# EAGLE board MCAT-CANYVAL-TOP-5X (EAGLE 7.2.0), part 1 of 2
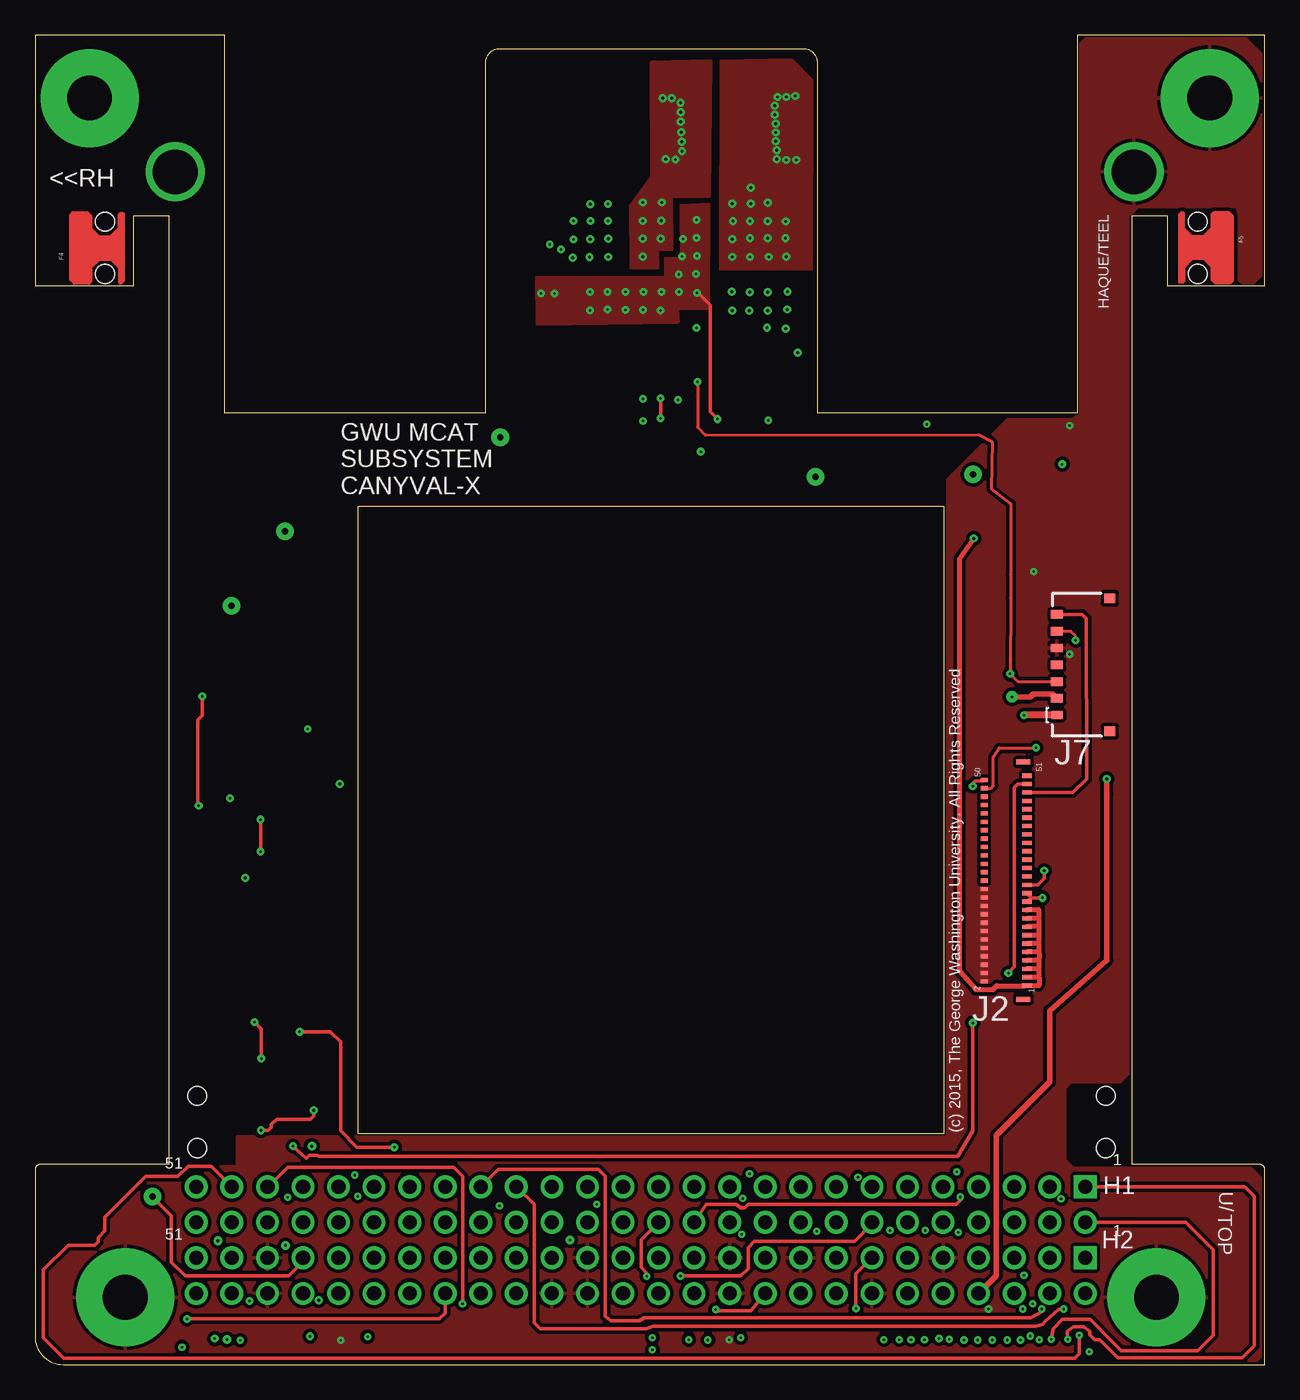
[diagram p0: board, top side]
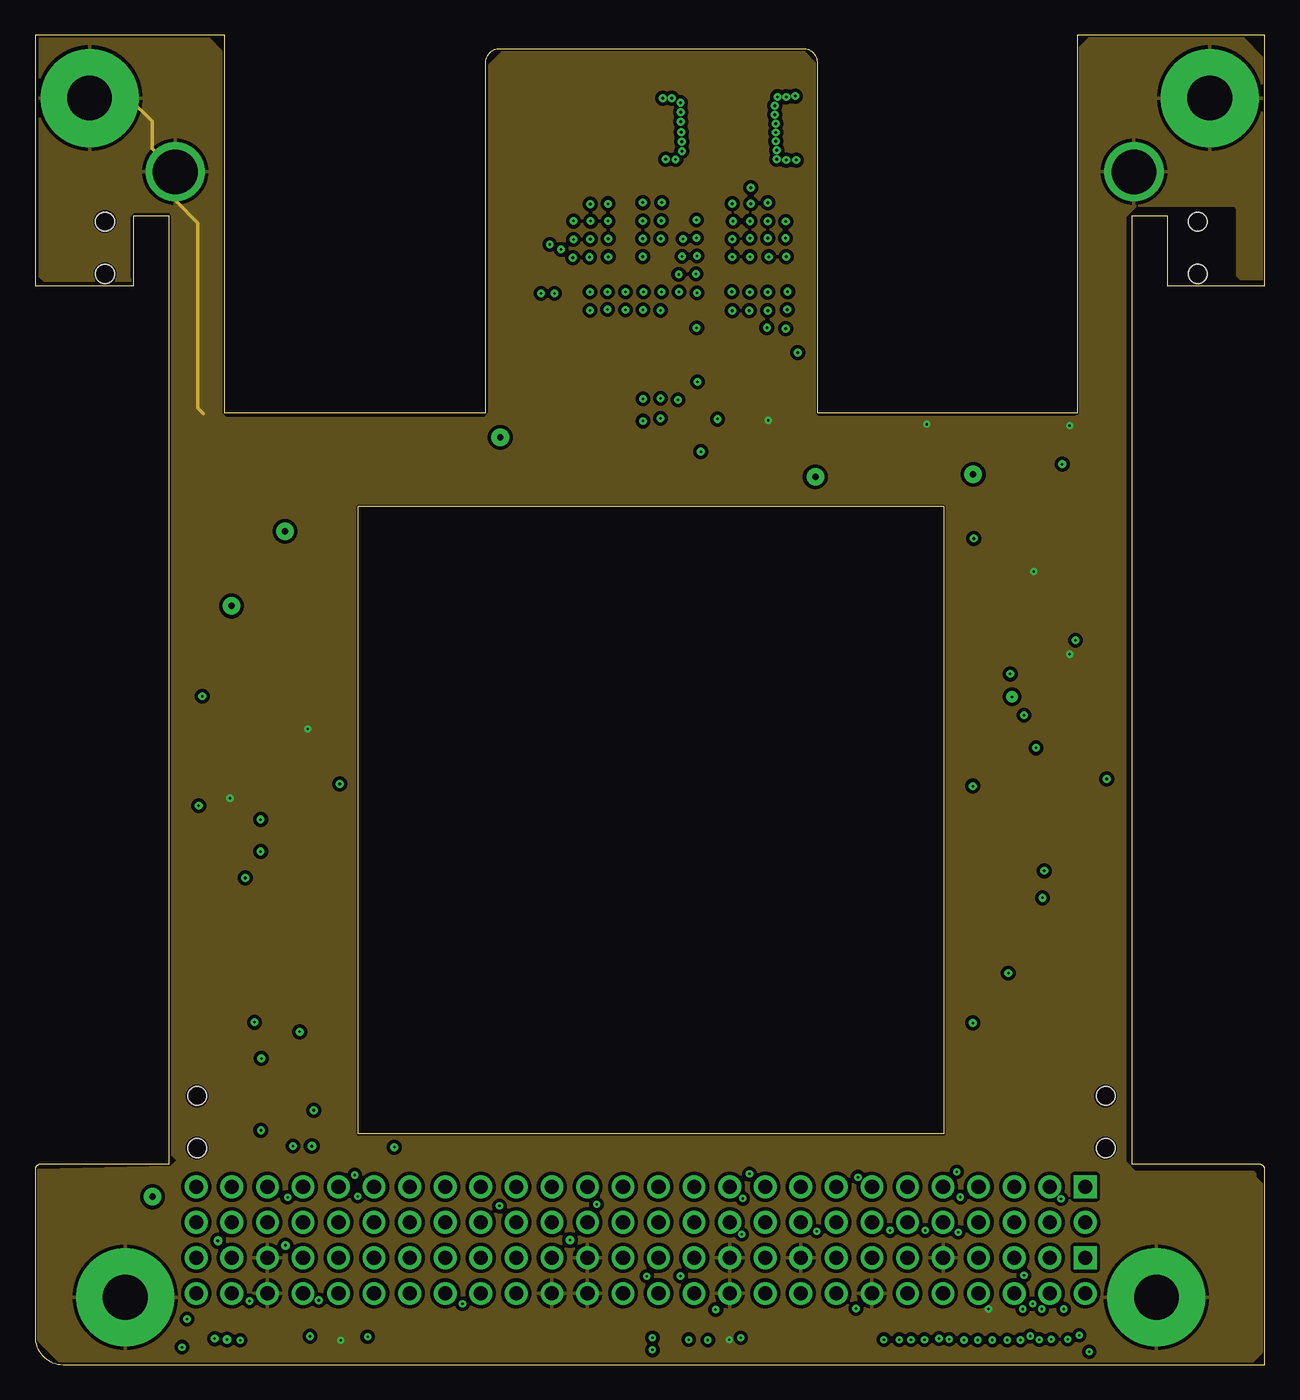
[diagram p1: board, inner layer L2/TopGround]
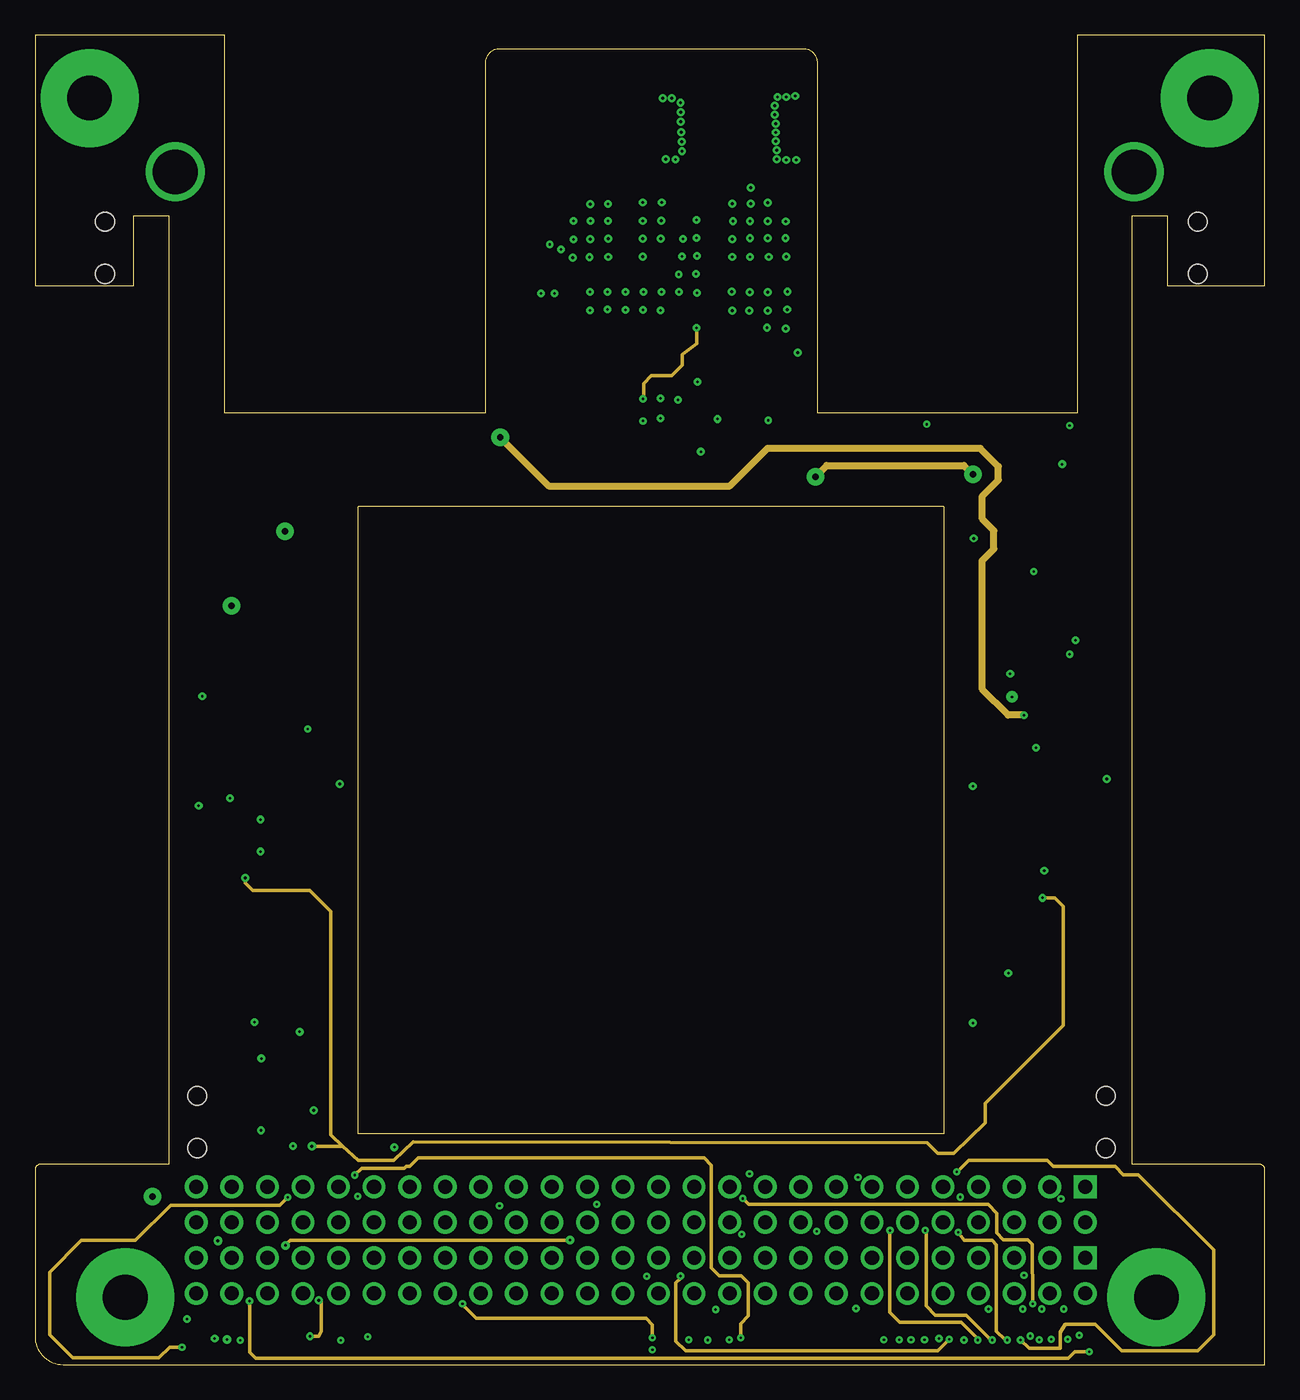
[diagram p2: board, inner layer L3/Power1]
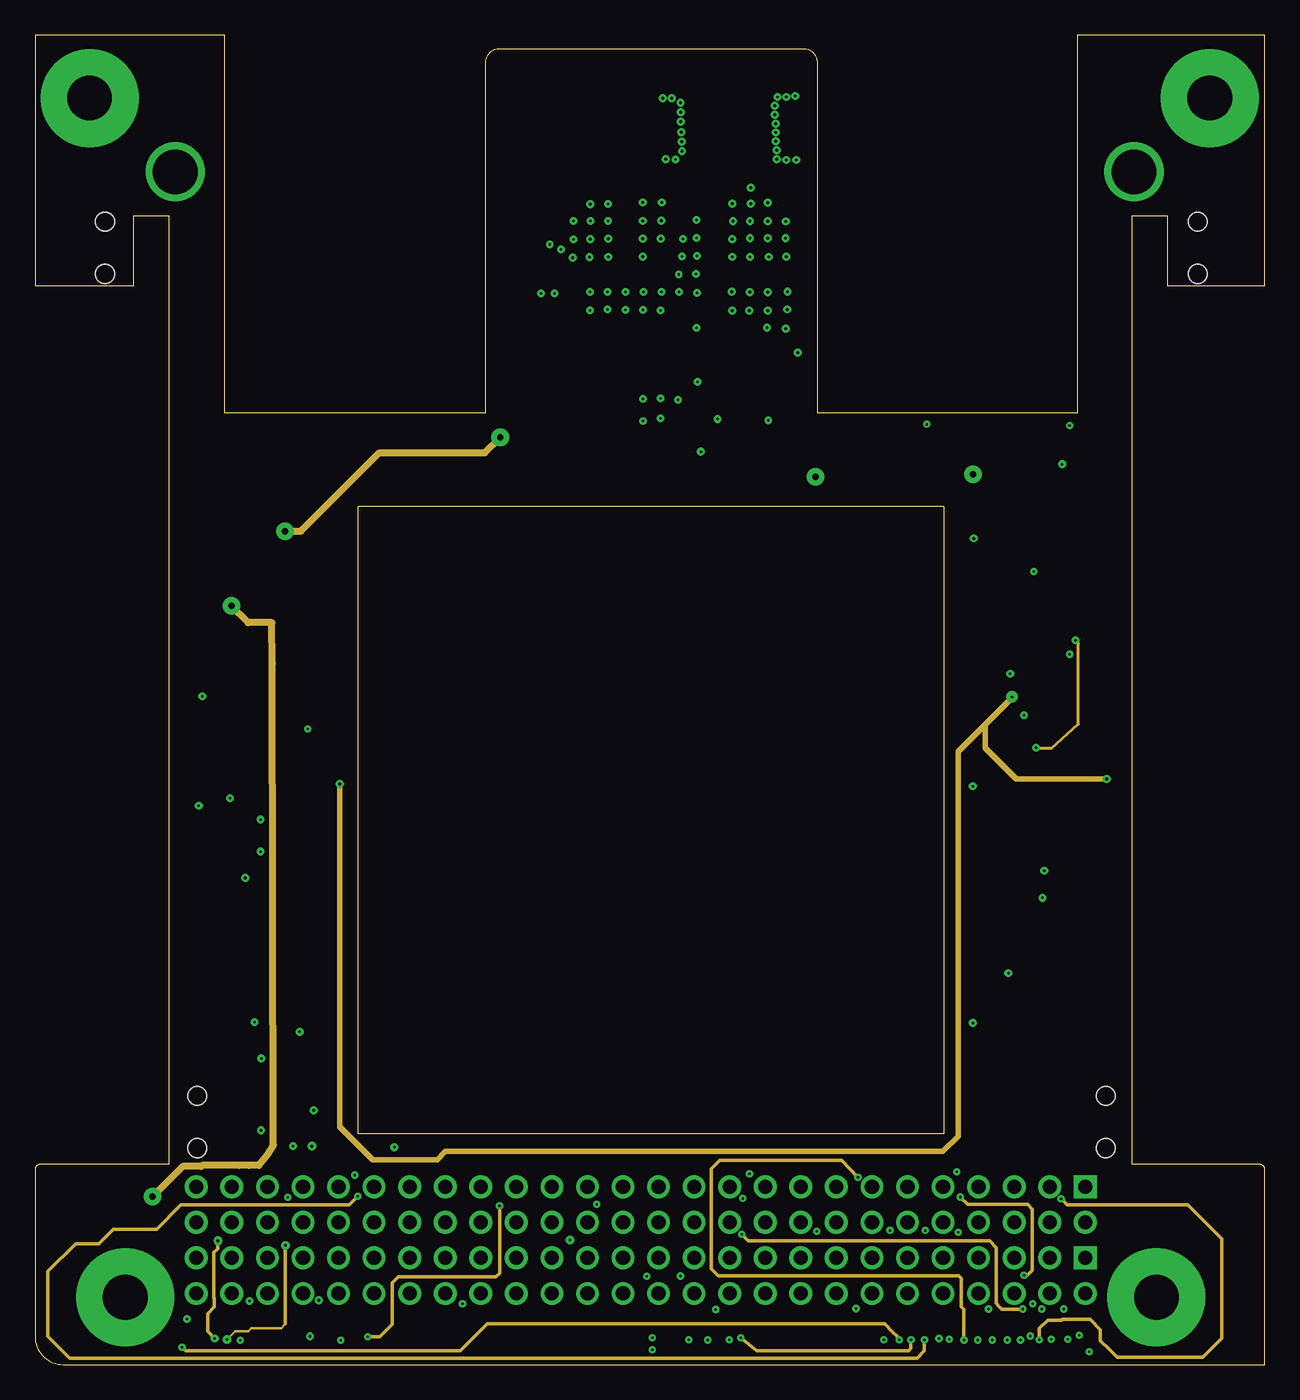
[diagram p3: board, inner layer L14/Power2]
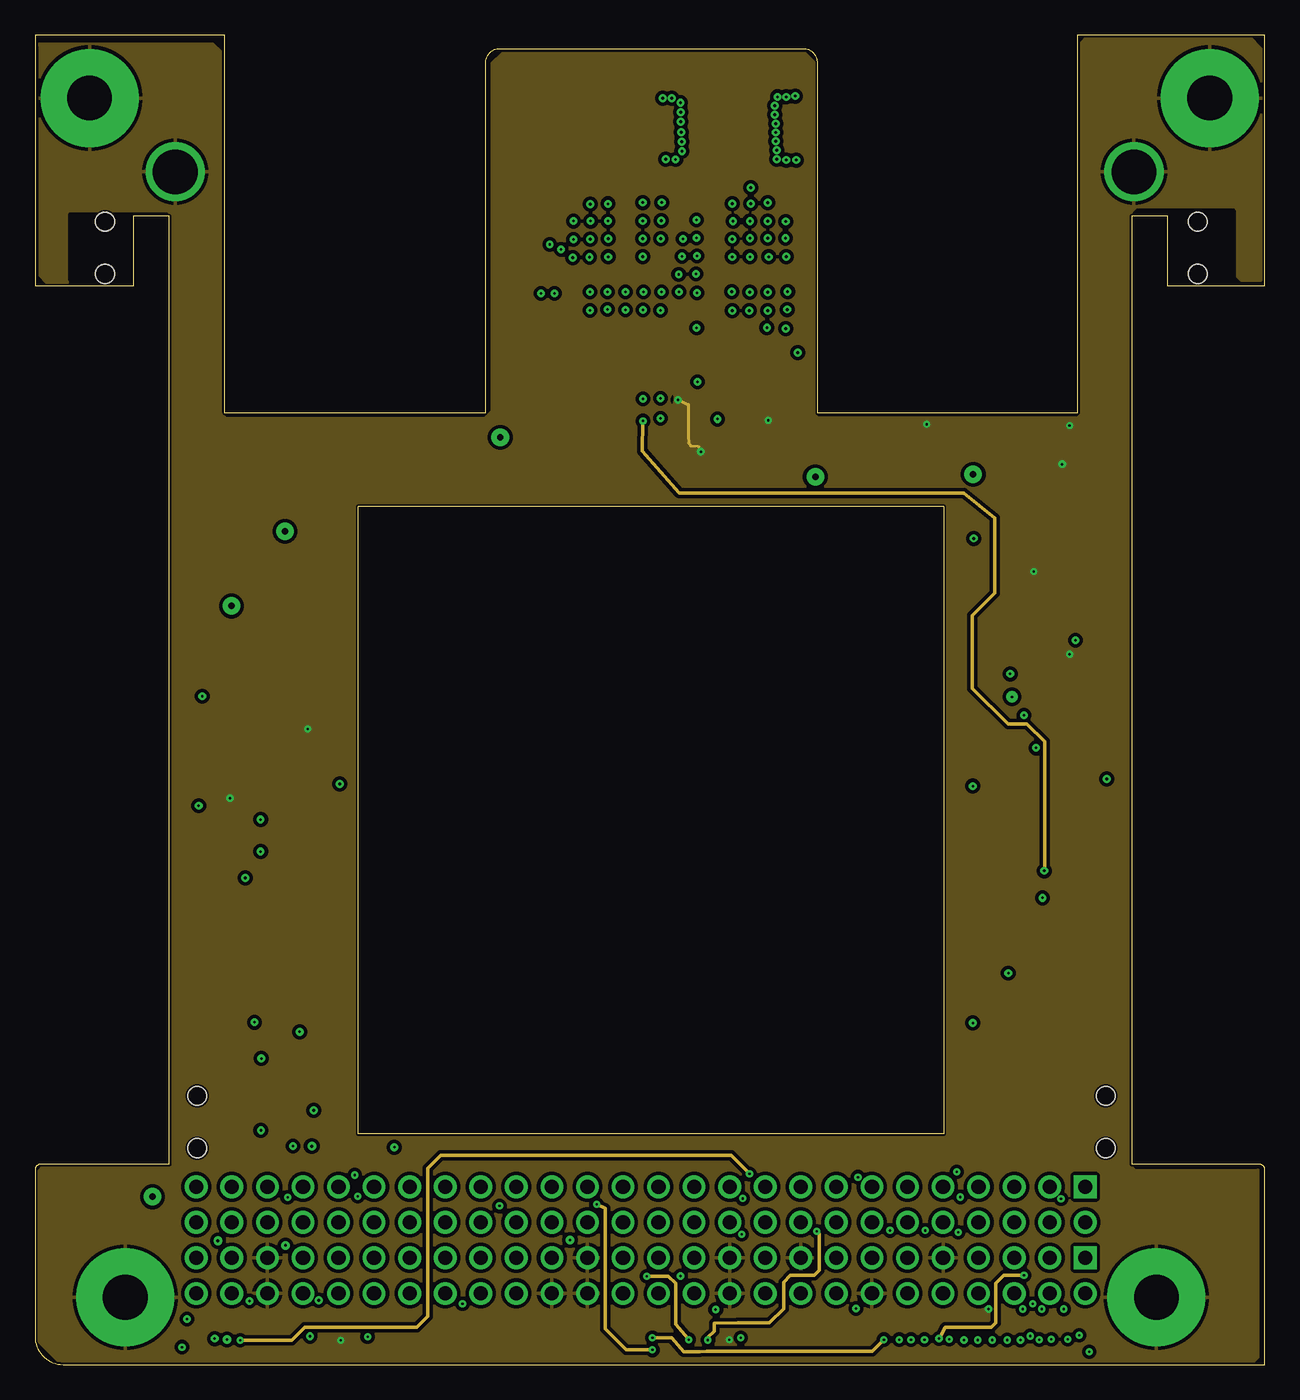
[diagram p4: board, inner layer L15/BottomGround]
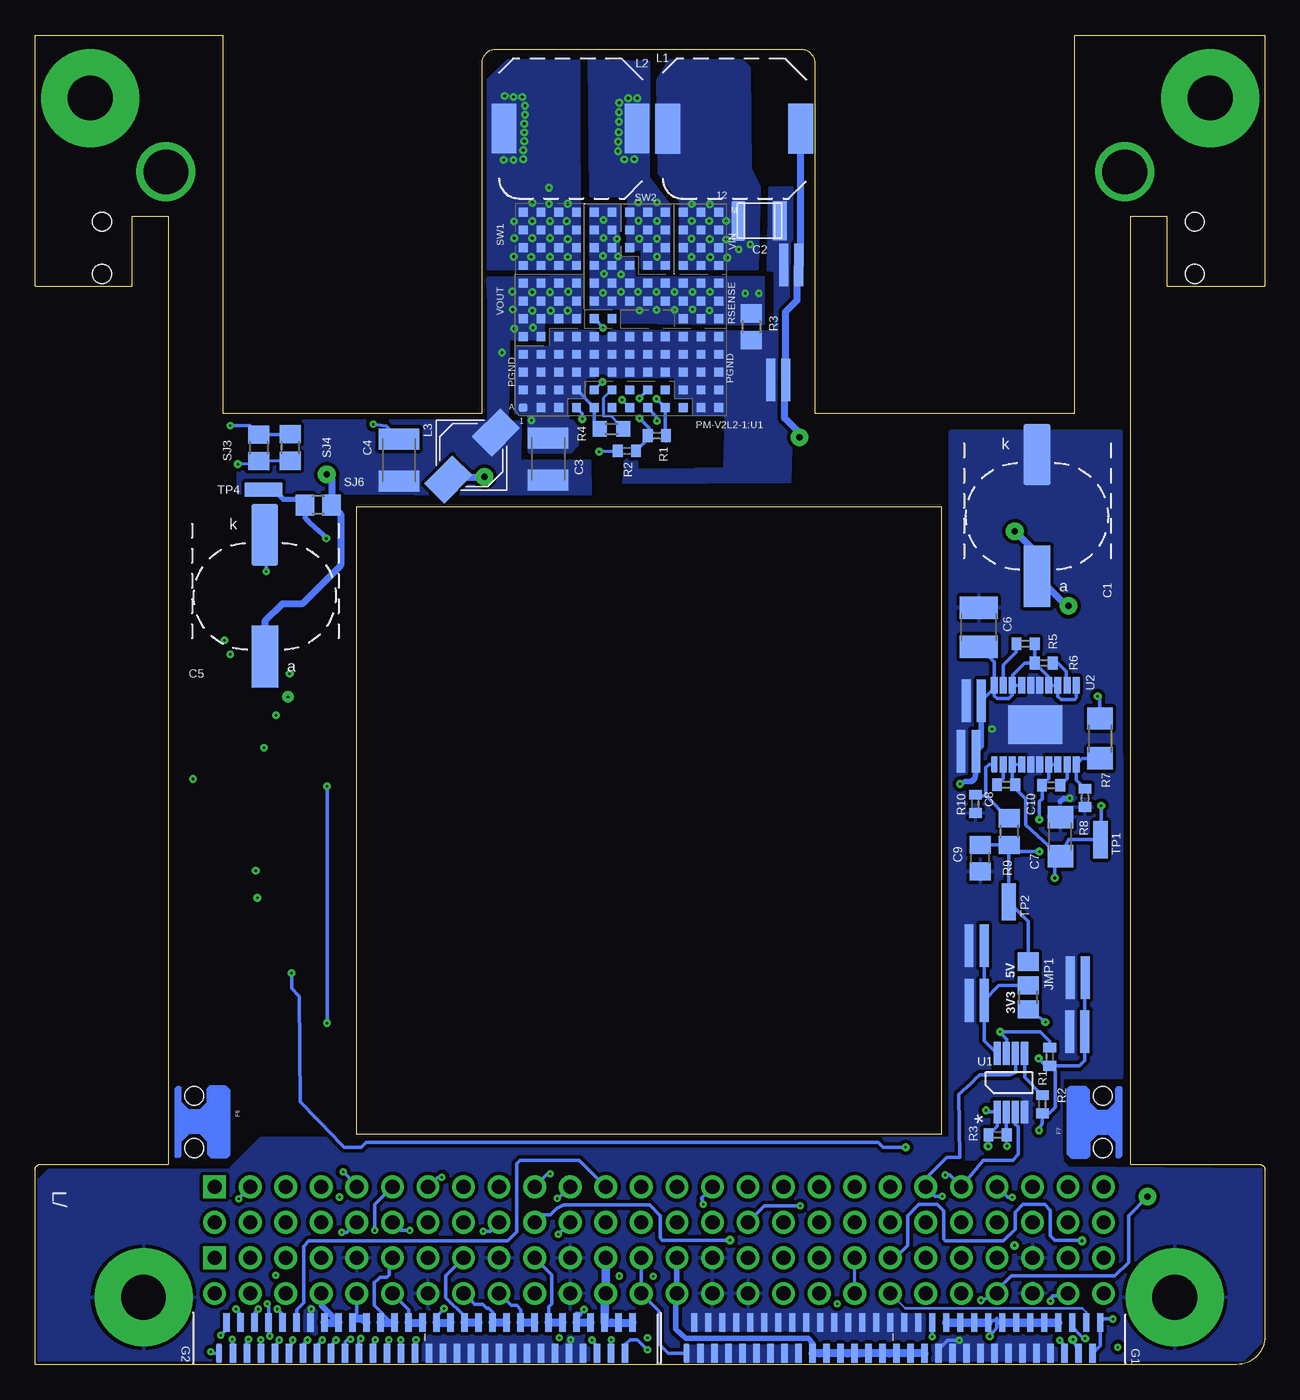
[diagram p5: board, bottom side, seen from below]

Size 87.85 x 95 mm. Coordinates in mm from the lower left corner, seen from the top.
Copper layers (1+2*3+14*15+16): L1/TopSignal 0.035559375mm / dielectric 3.5mil / L2/TopGround 0.01778125mm / dielectric 47mil / L3/Power1 0.0356mm / dielectric 12mil / L14/Power2 0.0356mm / dielectric 0.1499mm / L15/BottomGround 0.01778125mm / dielectric 3.5mil / L16/BottomSignal 0.035559375mm
Design rules "mcat-4cu-c-X3 *": minimum track width 6mil, minimum drill 6mil, track to track 10mil, track to pad 5mil, pad to pad 5mil, via to via 6mil, smd to smd 1mil, copper to edge 5mil, drill to drill 5mil, minimum pad ring 12mil, minimum via ring 7mil, stop-mask expansion 0mil, vias tented up to drill 8mil, thermal gap 10mil
Net classes: 0 default: width 0.051 mm; 1 1A-2OZ: width 0.152 mm; 2 2A-2OZ: width 0.356 mm; 3 0.3A-2OZ: width 0.254 mm; 4 General-1mil-100mA: width 0.025 mm; 5 0.5-2OZ: width 0.051 mm; 6 3A-2OZ: width 1.194 mm; 7 4.5A-2OZ: width 1.524 mm

## Footprints (pad centres in the part's own frame; a part is rotated, then mirrored left to right if it is on the bottom)
MCAT-4CU-C-TOP-V4-BLANK = drill 3.2: GND -78.97,85.22; GND@6 -10.49,85.22 | drill 3.2 pad 7: GND@1 -5.08,90.5; GND@2 -8.89,4.8; GND@3 -85.09,90.5; GND@4 -82.55,4.8
0612-REV = smd 3.05 x 0.635: 1 0,0; 2 0,1.077
MOLEX-78171-5007 = smd 0.6 x 0.85: 1 -3.6,0; 2 -2.4,0; 3 -1.2,0; 4 0,0; 5 1.2,0; 6 2.4,0; 7 3.6,0 | smd 0.7 x 0.8: 99 -4.75,-3.775; 100 4.75,-3.775
A0R-JMP = smd 1.5 x 1.3: 1 0,1.7; 2 0,0; 3 0,-1.7
R0402 = smd 0.7 x 0.9: 1 -0.65,0; 2 0.65,0
SOT505-1 = smd 1.626 x 0.508: 1 -2.095,0.975; 2 -2.095,0.325; 3 -2.095,-0.325; 4 -2.095,-0.975; 5 2.095,-0.975; 6 2.095,-0.325; 7 2.095,0.325; 8 2.095,0.975
SMTRA-M2-6-5 = hole 1.35: -1.869,0; 1.869,0
HIROSE-FH40-60S-0.5SV = smd 0.455 x 1.35: 1 0,0; 2 -1,0; 3 -2,0; 4 -3,0; 5 -4,0; 6 -5,0; 7 -6,0; 8 -7,0; 9 -8,0; 10 -9,0; 11 -10,0; 12 -11,0; 13 -12,0; 14 -13,0; 15 -14,0; 16 -15,0; 17 -16,0; 18 -17,0; 19 -18,0; 20 -19,0; 21 -20,0; 22 -21,0; 23 -22,0; 24 -23,0; 25 -24,0; 26 -25,0; 27 -26,0; 28 -27,0; 29 -28,0; 30 -29,0; 31 -0.554,-2.198; 32 -1.554,-2.198; 33 -2.554,-2.198; 34 -3.554,-2.198; 35 -4.554,-2.198; 36 -5.554,-2.198; 37 -6.554,-2.198; 38 -7.554,-2.198; 39 -8.554,-2.198; 40 -9.554,-2.198; 41 -10.554,-2.198; 42 -11.554,-2.198; 43 -12.554,-2.198; 44 -13.554,-2.198; 45 -14.554,-2.198; 46 -15.554,-2.198; 47 -16.554,-2.198; 48 -17.554,-2.198; 49 -18.554,-2.198; 50 -19.554,-2.198; 51 -20.554,-2.198; 52 -21.554,-2.198; 53 -22.554,-2.198; 54 -23.554,-2.198; 55 -24.554,-2.198; 56 -25.554,-2.198; 57 -26.554,-2.198; 58 -27.554,-2.198; 59 -28.554,-2.198; 60 -29.554,-2.198
CONN-2X26X0.1-HDR = drill 1.016 pad 1.524 square: 1 0,0 | drill 1.016 pad 1.524: 2 0,2.54; 3 2.54,0; 4 2.54,2.54; 5 5.08,0; 6 5.08,2.54; 7 7.62,0; 8 7.62,2.54; 9 10.16,0; 10 10.16,2.54; 11 12.7,0; 12 12.7,2.54; 13 15.24,0; 14 15.24,2.54; 15 17.78,0; 16 17.78,2.54; 17 20.32,0; 18 20.32,2.54; 19 22.86,0; 20 22.86,2.54; 21 25.4,0; 22 25.4,2.54; 23 27.94,0; 24 27.94,2.54; 25 30.48,0; 26 30.48,2.54; 27 33.02,0; 28 33.02,2.54; 29 35.56,0; 30 35.56,2.54; 31 38.1,0; 32 38.1,2.54; 33 40.64,0; 34 40.64,2.54; 35 43.18,0; 36 43.18,2.54; 37 45.72,0; 38 45.72,2.54; 39 48.26,0; 40 48.26,2.54; 41 50.8,0; 42 50.8,2.54; 43 53.34,0; 44 53.34,2.54; 45 55.88,0; 46 55.88,2.54; 47 58.42,0; 48 58.42,2.54; 49 60.96,0; 50 60.96,2.54; 51 63.5,0; 52 63.5,2.54
MOLEX-502598-5193 = smd 0.3 x 0.67: 1 -7.5,0.135; 3 -6.9,0.135; 5 -6.3,0.135; 7 -5.7,0.135; 9 -5.1,0.135; 11 -4.5,0.135; 13 -3.9,0.135; 15 -3.3,0.135; 17 -2.7,0.135; 19 -2.1,0.135; 21 -1.5,0.135; 23 -0.9,0.135; 25 -0.3,0.135; 27 0.3,0.135; 29 0.9,0.135; 31 1.5,0.135; 33 2.1,0.135; 35 2.7,0.135; 37 3.3,0.135; 39 3.9,0.135; 41 4.5,0.135; 43 5.1,0.135; 45 5.7,0.135; 47 6.3,0.135; 49 6.9,0.135; 51 7.5,0.135 | smd 0.3 x 0.5: 2 -7.2,3.2; 4 -6.6,3.2; 6 -6,3.2; 8 -5.4,3.2; 10 -4.8,3.2; 12 -4.2,3.2; 14 -3.6,3.2; 16 -3,3.2; 18 -2.4,3.2; 20 -1.8,3.2; 22 -1.2,3.2; 24 -0.6,3.2; 26 0,3.2; 28 0.6,3.2; 30 1.2,3.2; 32 1.8,3.2; 34 2.4,3.2; 36 3,3.2; 38 3.6,3.2; 40 4.2,3.2; 42 4.8,3.2; 44 5.4,3.2; 46 6,3.2; 48 6.6,3.2; 50 7.2,3.2 | smd 0.35 x 1: 99 -8.475,0.4; 100 8.475,0.4
OS-CON-SVPF-F12 = smd 1.9 x 4.4: A1 0,-4.3; K1 0,4.4
MLCC-X7R-1210 = smd 1 x 2.8: 1 1.6,0.05; 2 -1.35,0.05
C1210K = smd 1.5 x 2.9: 1 -1.5,0; 2 1.5,0
C1210 = smd 1.6 x 2.7: 1 -1.4,0; 2 1.4,0
C1206 = smd 1.6 x 1.8: 1 -1.4,0; 2 1.4,0
C0402 = smd 0.7 x 0.9: 1 -0.65,0; 2 0.65,0
C0805 = smd 1.3 x 1.5: 1 -0.95,0; 2 0.95,0
MSS1048 = smd 3.56 x 1.78: 1 5,9.85; 2 5,0.35
SERIES-POWER-INDUCTORS = smd 2.85 x 2 rotated 45: 1 1.75,1.6; 2 -1.65,-1.75
R0805 = smd 1.3 x 1.5: 1 -0.95,0; 2 0.95,0
R0603 = smd 1 x 1.1: 1 -0.85,0; 2 0.85,0
R1206 = smd 1.6 x 1.803: 1 -1.422,0; 2 1.422,0
PCB-MINI-SMD-TESTPOINT = smd 2.667 x 1.016: 1 0,0
LGA-141-LTC-05-08-1840-B = smd 0.63 x 0.63: A1 0.567,0.565; A2 1.837,0.565; A3 3.107,0.565; A4 4.377,0.565; A5 5.647,0.565; A6 6.917,0.565; A7 8.187,0.565; A8 9.457,0.565; A9 10.727,0.565; A10 11.997,0.565; A11 13.267,0.565; A12 14.537,0.565; B1 0.567,1.835; B2 1.837,1.835; B3 3.107,1.835; B4 4.377,1.835; B5 5.647,1.835; B6 6.917,1.835; B7 8.187,1.835; B8 9.457,1.835; B9 10.727,1.835; B10 11.997,1.835; B11 13.267,1.835; B12 14.537,1.835; C1 0.567,3.105; C2 1.837,3.105; C3 3.107,3.105; C4 4.377,3.105; C5 5.647,3.105; C6 6.917,3.105; C7 8.187,3.105; C8 9.457,3.105; C9 10.727,3.105; C10 11.997,3.105; C11 13.267,3.105; C12 14.537,3.105; D1 0.567,4.375; D2 1.837,4.375; D3 3.107,4.375; D4 4.377,4.375; D5 5.647,4.375; D6 6.917,4.375; D7 8.187,4.375; D8 9.457,4.375; D9 10.727,4.375; D10 11.997,4.375; D11 13.267,4.375; D12 14.537,4.375; E1 0.567,5.645; E2 1.837,5.645; E3 3.107,5.645; E4 4.377,5.645; E5 5.647,5.645; E6 6.917,5.645; E7 8.187,5.645; E8 9.457,5.645; E9 10.727,5.645; E10 11.997,5.645; E11 13.267,5.645; E12 14.537,5.645; F1 0.567,6.915; F2 1.837,6.915; F3 3.107,6.915; F4 4.377,6.915; F5 5.647,6.915; F6 6.917,6.915; F10 11.997,6.915; F11 13.267,6.915; F12 14.537,6.915; G1 0.567,8.185; G2 1.837,8.185; G3 3.107,8.185; G4 4.377,8.185; G5 5.647,8.185; G6 6.917,8.185; G7 8.187,8.185; G8 9.457,8.185; G9 10.727,8.185; G10 11.997,8.185; G11 13.267,8.185; G12 14.537,8.185; H2 1.837,9.455; H3 3.107,9.455; H4 4.377,9.455; H5 5.647,9.455; H6 6.917,9.455; H7 8.187,9.455; H8 9.457,9.455; H9 10.727,9.455; H10 11.997,9.455; H11 13.267,9.455; H12 14.537,9.455; J5 5.647,10.725; J6 6.917,10.725; J7 8.187,10.725; J8 9.457,10.725; J9 10.727,10.725; J10 11.997,10.725; J11 13.267,10.725; J12 14.537,10.725; K5 5.647,11.995; K6 6.917,11.995; K7 8.187,11.995; K8 9.457,11.995; K9 10.727,11.995; K10 11.997,11.995; K11 13.267,11.995; K12 14.537,11.995; L5 5.647,13.265; L6 6.917,13.265; L7 8.187,13.265; L8 9.457,13.265; L9 10.727,13.265; L10 11.997,13.265; L11 13.267,13.265; L12 14.537,13.265; M5 5.647,14.535; M6 6.917,14.535; M7 8.187,14.535; M8 9.457,14.535; M9 10.727,14.535; M10 11.997,14.535; M11 13.267,14.535; M12 14.537,14.535; SW1@J1 0.567,10.725; SW1@J2 1.837,10.725; SW1@J3 3.107,10.725; SW1@J4 4.377,10.725; SW1@K1 0.567,11.995; SW1@K2 1.837,11.995; SW1@K3 3.107,11.995; SW1@K4 4.377,11.995; SW1@L1 0.567,13.265; SW1@L2 1.837,13.265; SW1@L3 3.107,13.265; SW1@L4 4.377,13.265; SW1@M1 0.567,14.535; SW1@M2 1.837,14.535; SW1@M3 3.107,14.535; SW1@M4 4.377,14.535; VOUT 0.567,9.455
TSSOP20-FE-CB = smd 0.5 x 1.15: 1 0,0; 2 0.65,0; 3 1.3,0; 4 1.95,0; 5 2.6,0; 6 3.25,0; 7 3.9,0; 8 4.55,0; 9 5.2,0; 10 5.85,0; 11 5.85,5.65; 12 5.2,5.65; 13 4.55,5.65; 14 3.9,5.65; 15 3.25,5.65; 16 2.6,5.65; 17 1.95,5.65; 18 1.3,5.65; 19 0.65,5.65; 20 0,5.65 | smd 3.862 x 2.74: 21 2.925,2.825

## Placement (x,y rotation side)
B8  MCAT-4CU-C-PCB/TOP  [MCAT-4CU-C-TOP-V4-BLANK]  88.99,0 0 top
CT-V2L1-1:BC3  BYPASS-CAP-1UF  [0612-REV]  12.85,23.79 90 bottom
CT-V2L1-1:BC4  BYPASS-CAP-0.1UF  [0612-REV]  12.84,27.64 90 bottom
CT-V2L1-1:BC5  BYPASS-CAP-1UF  [0612-REV]  20.06,29.93 90 bottom
CT-V2L1-1:BC6  BYPASS-CAP-0.1UF  [0612-REV]  20.05,26.02 90 bottom
CT-V2L1-1:J7  MOLEX-78171-5007  [MOLEX-78171-5007]  72.99,50 90 top
CT-V2L1-1:JMP1  0R-JUMPA  [A0R-JMP]  16.91,27.08 180 bottom
CT-V2L1-1:R1  10k  [R0402]  15.36,22 270 bottom
CT-V2L1-1:R2  10k  [R0402]  15.9,18.6 270 bottom
CT-V2L1-1:R3  10k  [R0402]  19.09,16.41 180 bottom
CT-V2L1-1:U1  PCA9512ADP  [SOT505-1]  18.14,20.13 90 bottom
F4  SMTRAM2-6-5  [SMTRA-M2-6-5]  5.01,79.79 90 top
F5  SMTRAM2-6-5  [SMTRA-M2-6-5]  83.06,79.79 270 top
F6  SMTRAM2-6-5  [SMTRA-M2-6-5]  76.48,17.32 270 bottom
F7  SMTRAM2-6-5  [SMTRA-M2-6-5]  11.58,17.32 90 bottom
GBUS-TOP1:G1  HIROSE-FH40-60S-0.5SV  [HIROSE-FH40-60S-0.5SV]  41.31,0.8 180 bottom
GBUS-TOP1:G2  HIROSE-FH40-60S-0.5SV  [HIROSE-FH40-60S-0.5SV]  74.71,0.8 180 bottom
GBUS-TOP1:H1  H1-H5-INBOARD-CSK-BUS-CONN  [CONN-2X26X0.1-HDR]  75.02,12.7 180 top
GBUS-TOP1:H2  H2-H6-OUTBOARD-CSK-BUS-CONN  [CONN-2X26X0.1-HDR]  75.02,7.62 180 top
J2  MOLEX-502598-5193  [MOLEX-502598-5193]  70.99,34.57 90 top
PM-V2L2-1:BC1  BYPASS-CAP-0.1UF  [0612-REV]  20.63,43.82 90 bottom
PM-V2L2-1:BC2  BYPASS-CAP-1UF  [0612-REV]  20.25,47.43 90 bottom
PM-V2L2-1:BC3  BYPASS-CAP-0.1UF  [0612-REV]  33.3,78.58 90 bottom
PM-V2L2-1:BC4  BYPASS-CAP-1UF  [0612-REV]  34.23,70.35 90 bottom
PM-V2L2-1:C1  68uF  [OS-CON-SVPF-F12]  16.28,60.61 0 bottom
PM-V2L2-1:C2  4.7uF  [MLCC-X7R-1210]  36,81.77 180 bottom
PM-V2L2-1:C3  10uF  [C1210K]  51.2,64.71 90 bottom
PM-V2L2-1:C4  10uF  [C1210K]  61.85,64.63 90 bottom
PM-V2L2-1:C5  68uF  [OS-CON-SVPF-F12]  71.43,54.89 0 bottom
PM-V2L2-1:C6  10u  [C1210]  20.44,52.68 90 bottom
PM-V2L2-1:C7  10u  [C1206]  14.61,37.72 90 bottom
PM-V2L2-1:C8  10n  [C0402]  18.48,41.43 180 bottom
PM-V2L2-1:C9  3.3u  [C0805]  20.34,36.18 270 bottom
PM-V2L2-1:C10  10n  [C0402]  15.27,41.4 0 bottom
PM-V2L2-1:L1  33uH  [MSS1048]  43.01,93.31 270 bottom
PM-V2L2-1:L2  68uH  [MSS1048]  54.7,93.32 270 bottom
PM-V2L2-1:L3  10uH  [SERIES-POWER-INDUCTORS]  56.68,64.99 0 bottom
PM-V2L2-1:R1  2K  [R0402]  43.43,66.38 180 bottom
PM-V2L2-1:R2  1K  [R0402]  45.57,65.28 180 bottom
PM-V2L2-1:R3  27mOhms  [R0805]  36.69,74.15 270 bottom
PM-V2L2-1:R4  4k70.1%  [R0603]  46.67,66.85 0 bottom
PM-V2L2-1:R5  1M  [R0402]  17.1,51.5 0 bottom
PM-V2L2-1:R6  1M  [R0402]  15.79,50.13 180 bottom
PM-V2L2-1:R7  357K  [R1206]  11.79,44.74 90 bottom
PM-V2L2-1:R8  210K  [R0402]  12.86,40.49 90 bottom
PM-V2L2-1:R9  619K  [R0805]  18.28,38.09 270 bottom
PM-V2L2-1:R10  200K  [R0402]  20.69,40.06 90 bottom
PM-V2L2-1:SJ3  0R  [R0805]  71.87,65.51 270 bottom
PM-V2L2-1:SJ4  0R  [R0805]  69.63,65.53 270 bottom
PM-V2L2-1:SJ6  0R  [R0805]  67.61,61.4 180 bottom
PM-V2L2-1:TP1  PCB-MINI-SMD-TESTPOINT/SQ  [PCB-MINI-SMD-TESTPOINT]  11.75,37.5 270 bottom
PM-V2L2-1:TP2  PCB-MINI-SMD-TESTPOINT/SQ  [PCB-MINI-SMD-TESTPOINT]  18.29,33.05 90 bottom
PM-V2L2-1:TP4  PCB-MINI-SMD-TESTPOINT/SQ  [PCB-MINI-SMD-TESTPOINT]  71.52,62.52 180 bottom
PM-V2L2-1:U1  LTM4609MPV#PBF  [LGA-141-LTC-05-08-1840-B]  53.55,67.81 0 bottom
PM-V2L2-1:U2  LT3030MPFE#PBF  [TSSOP20-FE-CB]  19.33,42.88 0 bottom

## Library data of the parts
B8 = gwu_mpnl_ucat_v10; COPYRIGHT: (c) 2015, The George Washington University. All Rights Reserved; PCBLABEL: TOP
CT-V2L1-1:BC3 CT-V2L1-1:BC5 PM-V2L2-1:BC2 PM-V2L2-1:BC4 = gwu_mpnl_ucat_v10; MF: AVX; MPN: 0612YC105KAT2A
CT-V2L1-1:BC4 CT-V2L1-1:BC6 PM-V2L2-1:BC1 PM-V2L2-1:BC3 = gwu_mpnl_ucat_v10; MF: AVX; MPN: 06123C104KAT2A
CT-V2L1-1:J7 = gwu_mpnl_ucat_v10; MF: MOLEX; MPN: 78171-5007
CT-V2L1-1:JMP1 = jump-0r-smd; MF: Vishay/Dale; MPN: CRCW08050000Z0EA
CT-V2L1-1:R1-CT-V2L1-1:R3 = resistor; MF: PANASONIC; MPN: ERA-2AEB103X
CT-V2L1-1:U1 = gwu_mpnl_ucat_v10; MANUFACTURER_PART_NUMBER: PCA9512ADP; VENDOR: NXP
F4-F7 = gwu_mpnl_ucat_v10; MF: Penn Engineering; MPN: SMTRAM2-6-5-DT
GBUS-TOP1:G1 = gwu_mpnl_ucat_v10; MF: HIROSE/HRS; MPN: FH40-60S-0.5SV; PCBLABEL: G1
GBUS-TOP1:G2 = gwu_mpnl_ucat_v10; MF: HIROSE/HRS; MPN: FH40-60S-0.5SV; PCBLABEL: G2
GBUS-TOP1:H1 = gwu_mpnl_ucat_v10; MF: SAMTEC; MPN: ESQ-126-37-G-D; PCBLABEL: H1
GBUS-TOP1:H2 = gwu_mpnl_ucat_v10; MF: SAMTEC; MPN: ESQ-126-37-G-D; PCBLABEL: H2
J2 = gwu_mpnl_ucat_v10; MF: MOLEX; MPN: 502598-5193
PM-V2L2-1:C1 PM-V2L2-1:C5 = samudra_ucat_v9; MF: OSCON; MPN: 50SVPF68M
PM-V2L2-1:C2 = samudra_ucat_v9; MF: AVX; MPN: LD105C475KAB2A
PM-V2L2-1:C3 PM-V2L2-1:C4 = rcl; MF: MURATA; MPN: GRM32ER71H106KA12L
PM-V2L2-1:C6 = adafruit; MF: AVX; MPN: TCJT106M016R0200
PM-V2L2-1:C7 = resistor; MF: TDK; MPN: C3216X7R1C106K160AC
PM-V2L2-1:C8 PM-V2L2-1:C10 = resistor; MF: VISHAY/VITRAMON; MPN: VJ0402Y103JXJPW1BC
PM-V2L2-1:C9 = resistor; MF: TDK; MPN: C2012X7R1C335K125AB
PM-V2L2-1:L1 = gwu_mpnl_ucat_v10; MF: COILCRAFT; MPN: MSS1048T-333ML_
PM-V2L2-1:L2 = gwu_mpnl_ucat_v10; MF: COILCRAFT; MPN: MSS1048T-672NL_
PM-V2L2-1:L3 = gwu_mpnl_ucat_v10; MF: PANASONIC; MPN: ELL5PS100M; OC_FARNELL: 1717452
PM-V2L2-1:R1 = rcl; MF: KOA SPEER; MPN: RN731ETTP2001B25
PM-V2L2-1:R2 = rcl; MF: KOA SPEER; MPN: RN73H1ETTP1001B25
PM-V2L2-1:R3 = resistor; MF: VISHAY; MPN: WSLP0805R0270FEA
PM-V2L2-1:R4 = resistor; MF: TE Connectivity/Holsworthy; MPN: RN73C1J4K64BTDG
PM-V2L2-1:R5 PM-V2L2-1:R6 = rcl; MF: VISHAY/BEYSCHLAG; MPN: MCS04020C1004FE000
PM-V2L2-1:R7 = rcl; MF: IRC / TT Electronics; MPN: PCF-W1206LF-12-3573-B-P-LT
PM-V2L2-1:R8 = rcl; MF: Vishay / Dale; MPN: CRCW0402210KFKED
PM-V2L2-1:R9 = rcl; MF: Welwyn Components / TT Electronics; MPN: PCF0805R-619KBT1
PM-V2L2-1:R10 = rcl; MF: Vishay / Dale; MPN: CRCW0402200KFKED
PM-V2L2-1:SJ3 PM-V2L2-1:SJ4 PM-V2L2-1:SJ6 = resistor; MF: YAGEO; MPN: AF0805JR-070RL
PM-V2L2-1:TP1 PM-V2L2-1:TP2 PM-V2L2-1:TP4 = gwu_mpnl_ucat_v10; MF: Keystone Electronics; MPN: 5015
PM-V2L2-1:U1 = gwu_mpnl_ucat_v10; MF: Linear; MPN: LTM4609MPV#PBF
PM-V2L2-1:U2 = gwu_mpnl_ucat_v10; MF: LINEAR; MPN: LT3030MPFE#TRPBF

## Nets
CT-V2L1-1:I2C_VCC: CT-V2L1-1:BC5.1 CT-V2L1-1:BC6.1 CT-V2L1-1:JMP1.2 CT-V2L1-1:U1.8
CT-V2L1-1:N$2: CT-V2L1-1:R2.1 CT-V2L1-1:U1.5
GBUS-TOP1:G-H1-1: GBUS-TOP1:G2.2 GBUS-TOP1:H1.1
GBUS-TOP1:G-H1-2: GBUS-TOP1:G2.3 GBUS-TOP1:H1.2
GBUS-TOP1:G-H1-3: GBUS-TOP1:G2.4 GBUS-TOP1:H1.3
GBUS-TOP1:G-H1-9: GBUS-TOP1:G2.5 GBUS-TOP1:H1.9
GBUS-TOP1:G-H1-10: GBUS-TOP1:G2.6 GBUS-TOP1:H1.10
GBUS-TOP1:G-H1-11: GBUS-TOP1:G2.7 GBUS-TOP1:H1.11
GBUS-TOP1:G-H1-12: GBUS-TOP1:G2.8 GBUS-TOP1:H1.12
GBUS-TOP1:G-H1-13: GBUS-TOP1:G2.9 GBUS-TOP1:H1.13
GBUS-TOP1:G-H1-14: GBUS-TOP1:G2.10 GBUS-TOP1:H1.14
GBUS-TOP1:G-H1-18: GBUS-TOP1:G2.28 GBUS-TOP1:H1.18
GBUS-TOP1:G-H1-19: GBUS-TOP1:G1.28 GBUS-TOP1:H1.19
GBUS-TOP1:G-H1-20: GBUS-TOP1:G1.29 GBUS-TOP1:H1.20
GBUS-TOP1:G-H1-21: GBUS-TOP1:G2.34 GBUS-TOP1:H1.21
GBUS-TOP1:G-H1-22: GBUS-TOP1:G2.35 GBUS-TOP1:H1.22
GBUS-TOP1:G-H1-23: GBUS-TOP1:G2.36 GBUS-TOP1:H1.23
GBUS-TOP1:G-H1-24: GBUS-TOP1:G2.11 GBUS-TOP1:H1.24
GBUS-TOP1:G-H1-26: GBUS-TOP1:G2.29 GBUS-TOP1:H1.26
GBUS-TOP1:G-H1-29 [General-1mil-100mA]: GBUS-TOP1:G2.30 GBUS-TOP1:H1.29
GBUS-TOP1:G-H1-33: GBUS-TOP1:G2.32 GBUS-TOP1:H1.33
GBUS-TOP1:G-H1-35: GBUS-TOP1:G2.33 GBUS-TOP1:H1.35
GBUS-TOP1:G-H1-45: GBUS-TOP1:G2.14 GBUS-TOP1:H1.45
GBUS-TOP1:G-H1-47: GBUS-TOP1:G2.15 GBUS-TOP1:H1.47
GBUS-TOP1:G-H1-49: GBUS-TOP1:G2.31 GBUS-TOP1:H1.49
GBUS-TOP1:G-H2-50: GBUS-TOP1:G2.1 GBUS-TOP1:H2.50
GBUS-TOP1:M-3V3-BUS: GBUS-TOP1:G1.10 GBUS-TOP1:G1.11 GBUS-TOP1:G1.12 GBUS-TOP1:G1.13 GBUS-TOP1:G1.14 GBUS-TOP1:G1.15 GBUS-TOP1:G1.16 GBUS-TOP1:G1.17 GBUS-TOP1:G1.18 GBUS-TOP1:H2.27 GBUS-TOP1:H2.28
GBUS-TOP1:M-5V-BUS: GBUS-TOP1:G1.1 GBUS-TOP1:G1.2 GBUS-TOP1:G1.3 GBUS-TOP1:G1.4 GBUS-TOP1:G1.5 GBUS-TOP1:G1.6 GBUS-TOP1:G1.7 GBUS-TOP1:G1.8 GBUS-TOP1:G1.9 GBUS-TOP1:H2.25 GBUS-TOP1:H2.26
GBUS-TOP1:M-5V-USB-CHG: GBUS-TOP1:G1.48 GBUS-TOP1:H1.32
GBUS-TOP1:M-12V-BUS: GBUS-TOP1:G2.58 GBUS-TOP1:G2.59 GBUS-TOP1:G2.60 GBUS-TOP1:H2.23 GBUS-TOP1:H2.24
GBUS-TOP1:M-SW2-12V: GBUS-TOP1:G2.40 GBUS-TOP1:G2.41 GBUS-TOP1:H2.10
GBUS-TOP1:M-SW3-BAT: GBUS-TOP1:G2.42 GBUS-TOP1:G2.43 GBUS-TOP1:H2.11
GBUS-TOP1:M-SW4-BAT: GBUS-TOP1:G2.44 GBUS-TOP1:G2.45 GBUS-TOP1:H2.12
GBUS-TOP1:M-SW5-5V: GBUS-TOP1:G2.46 GBUS-TOP1:G2.47 GBUS-TOP1:H2.13
GBUS-TOP1:M-SW6-5V: GBUS-TOP1:G2.48 GBUS-TOP1:G2.49 GBUS-TOP1:H2.15
GBUS-TOP1:M-SW7-5V: GBUS-TOP1:G2.50 GBUS-TOP1:G2.51 GBUS-TOP1:H2.16
GBUS-TOP1:M-SW8-3V3: GBUS-TOP1:G2.52 GBUS-TOP1:G2.53 GBUS-TOP1:H2.18
GBUS-TOP1:M-SW9-3V3: GBUS-TOP1:G2.54 GBUS-TOP1:G2.55 GBUS-TOP1:H2.19
GBUS-TOP1:M-SW10-3V3: GBUS-TOP1:G2.56 GBUS-TOP1:G2.57 GBUS-TOP1:H2.20
GBUS-TOP1:RBF_SW: GBUS-TOP1:G1.30 GBUS-TOP1:G1.60 GBUS-TOP1:H2.37 GBUS-TOP1:H2.38
GBUS-TOP1:SEP_SW1: GBUS-TOP1:G1.58 GBUS-TOP1:H2.39
GBUS-TOP1:SEP_SW2: GBUS-TOP1:G1.59 GBUS-TOP1:H2.40
GND: B8.GND B8.GND@1 B8.GND@2 B8.GND@3 B8.GND@4 B8.GND@6 CT-V2L1-1:BC3.2 CT-V2L1-1:BC4.2 CT-V2L1-1:BC5.2 CT-V2L1-1:BC6.2 CT-V2L1-1:J7.5 CT-V2L1-1:U1.4 GBUS-TOP1:G1.19 GBUS-TOP1:G1.20 GBUS-TOP1:G1.21 GBUS-TOP1:G1.22 GBUS-TOP1:G1.23 GBUS-TOP1:G1.24 GBUS-TOP1:G1.25 GBUS-TOP1:G1.26 GBUS-TOP1:G1.27 GBUS-TOP1:G1.31 GBUS-TOP1:G1.32 GBUS-TOP1:G1.33 GBUS-TOP1:G1.34 GBUS-TOP1:G1.35 GBUS-TOP1:G1.36 GBUS-TOP1:G1.37 GBUS-TOP1:G1.38 GBUS-TOP1:G1.39 GBUS-TOP1:G1.40 GBUS-TOP1:G1.41 GBUS-TOP1:G1.42 GBUS-TOP1:G1.43 GBUS-TOP1:G1.44 GBUS-TOP1:G1.45 GBUS-TOP1:G1.46 GBUS-TOP1:G1.47 GBUS-TOP1:G2.16 GBUS-TOP1:G2.17 GBUS-TOP1:G2.18 GBUS-TOP1:G2.19 GBUS-TOP1:G2.20 GBUS-TOP1:G2.21 GBUS-TOP1:G2.22 GBUS-TOP1:G2.23 GBUS-TOP1:G2.24 GBUS-TOP1:G2.25 GBUS-TOP1:G2.26 GBUS-TOP1:G2.27 GBUS-TOP1:G2.37 GBUS-TOP1:H2.9 GBUS-TOP1:H2.14 GBUS-TOP1:H2.17 GBUS-TOP1:H2.21 GBUS-TOP1:H2.22 GBUS-TOP1:H2.29 GBUS-TOP1:H2.30 GBUS-TOP1:H2.32 GBUS-TOP1:H2.47 GBUS-TOP1:H2.48 J2.2 J2.4 J2.6 J2.8 J2.10 J2.12 J2.14 J2.16 J2.18 J2.20 J2.22 J2.24 PM-V2L2-1:BC1.2 PM-V2L2-1:BC2.2 PM-V2L2-1:BC3.2 PM-V2L2-1:BC4.2 PM-V2L2-1:C1.K1 PM-V2L2-1:C2.2 PM-V2L2-1:C3.2 PM-V2L2-1:C4.2 PM-V2L2-1:C5.K1 PM-V2L2-1:C6.2 PM-V2L2-1:C7.2 PM-V2L2-1:C9.2 PM-V2L2-1:R3.2 PM-V2L2-1:R4.1 PM-V2L2-1:R8.1 PM-V2L2-1:R10.1 PM-V2L2-1:SJ3.1 PM-V2L2-1:SJ4.1 PM-V2L2-1:U1.A1 PM-V2L2-1:U1.A2 PM-V2L2-1:U1.A3 PM-V2L2-1:U1.A5 PM-V2L2-1:U1.A11 PM-V2L2-1:U1.A12 PM-V2L2-1:U1.B1 PM-V2L2-1:U1.B2 PM-V2L2-1:U1.B3 PM-V2L2-1:U1.B4 PM-V2L2-1:U1.B10 PM-V2L2-1:U1.B11 PM-V2L2-1:U1.B12 PM-V2L2-1:U1.C1 PM-V2L2-1:U1.C2 PM-V2L2-1:U1.C3 PM-V2L2-1:U1.C4 PM-V2L2-1:U1.C5 PM-V2L2-1:U1.C6 PM-V2L2-1:U1.C7 PM-V2L2-1:U1.C8 PM-V2L2-1:U1.C9 PM-V2L2-1:U1.C10 PM-V2L2-1:U1.C11 PM-V2L2-1:U1.C12 PM-V2L2-1:U1.D1 PM-V2L2-1:U1.D2 PM-V2L2-1:U1.D3 PM-V2L2-1:U1.D4 PM-V2L2-1:U1.D5 PM-V2L2-1:U1.D6 PM-V2L2-1:U1.D7 PM-V2L2-1:U1.D8 PM-V2L2-1:U1.D9 PM-V2L2-1:U1.D10 PM-V2L2-1:U1.D11 PM-V2L2-1:U1.D12 PM-V2L2-1:U1.E3 PM-V2L2-1:U1.E4 PM-V2L2-1:U1.E5 PM-V2L2-1:U1.E6 PM-V2L2-1:U1.E7 PM-V2L2-1:U1.E8 PM-V2L2-1:U1.E9 PM-V2L2-1:U1.E10 PM-V2L2-1:U1.E11 PM-V2L2-1:U1.E12 PM-V2L2-1:U2.5 PM-V2L2-1:U2.6 PM-V2L2-1:U2.15 PM-V2L2-1:U2.16 PM-V2L2-1:U2.21
MCAT_SCL [General-1mil-100mA]: CT-V2L1-1:R3.1 CT-V2L1-1:U1.2 J2.50
MCAT_SDA [General-1mil-100mA]: CT-V2L1-1:R1.1 CT-V2L1-1:U1.7 J2.49
P3 [0.3A-2OZ]: CT-V2L1-1:BC3.1 CT-V2L1-1:BC4.1 CT-V2L1-1:JMP1.1 CT-V2L1-1:R1.2 CT-V2L1-1:R2.2 CT-V2L1-1:R3.2 CT-V2L1-1:U1.1 J2.21 J2.23 PM-V2L2-1:C7.1 PM-V2L2-1:C8.1 PM-V2L2-1:R7.2 PM-V2L2-1:TP1.1 PM-V2L2-1:U2.3 PM-V2L2-1:U2.4
P5: CT-V2L1-1:JMP1.3 PM-V2L2-1:C9.1 PM-V2L2-1:C10.1 PM-V2L2-1:R9.2 PM-V2L2-1:TP2.1 PM-V2L2-1:U2.7 PM-V2L2-1:U2.8
P12_IN [2A-2OZ]: CT-V2L1-1:J7.2 GBUS-TOP1:G2.38 GBUS-TOP1:G2.39 GBUS-TOP1:H2.8 PM-V2L2-1:BC1.1 PM-V2L2-1:BC2.1 PM-V2L2-1:C6.1 PM-V2L2-1:R5.2 PM-V2L2-1:R6.2 PM-V2L2-1:U2.11 PM-V2L2-1:U2.13 PM-V2L2-1:U2.14 PM-V2L2-1:U2.17 PM-V2L2-1:U2.18 PM-V2L2-1:U2.20
PGOOD_PMA: CT-V2L1-1:J7.3 PM-V2L2-1:U1.B5
PM-V2L2-1:ADJ1: PM-V2L2-1:R9.1 PM-V2L2-1:R10.2 PM-V2L2-1:U2.1
PM-V2L2-1:ADJ2: PM-V2L2-1:R7.1 PM-V2L2-1:R8.2 PM-V2L2-1:U2.10
PM-V2L2-1:BYP1: PM-V2L2-1:C8.2 PM-V2L2-1:U2.2
PM-V2L2-1:BYP2: PM-V2L2-1:C10.2 PM-V2L2-1:U2.9
PM-V2L2-1:INTVCC: PM-V2L2-1:R1.1 PM-V2L2-1:U1.A9 PM-V2L2-1:U1.F5
PM-V2L2-1:P18_OUT [1A-2OZ]: PM-V2L2-1:C5.A1 PM-V2L2-1:L3.2 PM-V2L2-1:SJ6.1
PM-V2L2-1:PWRDGD2: PM-V2L2-1:R6.1 PM-V2L2-1:U2.12
PM-V2L2-1:PWRGD1: PM-V2L2-1:R5.1 PM-V2L2-1:U2.19
PM-V2L2-1:RSENSE: PM-V2L2-1:R3.1 PM-V2L2-1:U1.A4 PM-V2L2-1:U1.F10 PM-V2L2-1:U1.F11 PM-V2L2-1:U1.F12 PM-V2L2-1:U1.G5 PM-V2L2-1:U1.G6 PM-V2L2-1:U1.G7 PM-V2L2-1:U1.G8 PM-V2L2-1:U1.G9 PM-V2L2-1:U1.G10 PM-V2L2-1:U1.G11 PM-V2L2-1:U1.G12 PM-V2L2-1:U1.H5 PM-V2L2-1:U1.H6 PM-V2L2-1:U1.H7 PM-V2L2-1:U1.H8 PM-V2L2-1:U1.H9 PM-V2L2-1:U1.H10 PM-V2L2-1:U1.H11 PM-V2L2-1:U1.H12 PM-V2L2-1:U1.J5 PM-V2L2-1:U1.J6 PM-V2L2-1:U1.J7 PM-V2L2-1:U1.K5 PM-V2L2-1:U1.K6 PM-V2L2-1:U1.L5 PM-V2L2-1:U1.L6 PM-V2L2-1:U1.M5 PM-V2L2-1:U1.M6
PM-V2L2-1:SETFREQ: PM-V2L2-1:R1.2 PM-V2L2-1:R2.1 PM-V2L2-1:U1.B8
PM-V2L2-1:SGND: PM-V2L2-1:R2.2 PM-V2L2-1:SJ3.2 PM-V2L2-1:SJ4.2 PM-V2L2-1:U1.A7
PM-V2L2-1:SW1: PM-V2L2-1:L2.2 PM-V2L2-1:U1.SW1@J1 PM-V2L2-1:U1.SW1@J2 PM-V2L2-1:U1.SW1@J3 PM-V2L2-1:U1.SW1@J4 PM-V2L2-1:U1.SW1@K1 PM-V2L2-1:U1.SW1@K2 PM-V2L2-1:U1.SW1@K3 PM-V2L2-1:U1.SW1@K4 PM-V2L2-1:U1.SW1@L1 PM-V2L2-1:U1.SW1@L2 PM-V2L2-1:U1.SW1@L3 PM-V2L2-1:U1.SW1@L4 PM-V2L2-1:U1.SW1@M1 PM-V2L2-1:U1.SW1@M2 PM-V2L2-1:U1.SW1@M3 PM-V2L2-1:U1.SW1@M4
PM-V2L2-1:SW2: PM-V2L2-1:L2.1 PM-V2L2-1:U1.J8 PM-V2L2-1:U1.J9 PM-V2L2-1:U1.K7 PM-V2L2-1:U1.K8 PM-V2L2-1:U1.K9 PM-V2L2-1:U1.L7 PM-V2L2-1:U1.L8 PM-V2L2-1:U1.L9 PM-V2L2-1:U1.M7 PM-V2L2-1:U1.M8 PM-V2L2-1:U1.M9
PM-V2L2-1:VFB: PM-V2L2-1:R4.2 PM-V2L2-1:U1.B6
PM-V2L2-1:VIN [2A-2OZ]: PM-V2L2-1:C2.1 PM-V2L2-1:L1.2 PM-V2L2-1:U1.J10 PM-V2L2-1:U1.J11 PM-V2L2-1:U1.J12 PM-V2L2-1:U1.K10 PM-V2L2-1:U1.K11 PM-V2L2-1:U1.K12 PM-V2L2-1:U1.L10 PM-V2L2-1:U1.L11 PM-V2L2-1:U1.L12 PM-V2L2-1:U1.M10 PM-V2L2-1:U1.M11 PM-V2L2-1:U1.M12
PM-V2L2-1:VOUT [1A-2OZ]: PM-V2L2-1:C3.1 PM-V2L2-1:C4.1 PM-V2L2-1:L3.1 PM-V2L2-1:U1.E1 PM-V2L2-1:U1.E2 PM-V2L2-1:U1.F1 PM-V2L2-1:U1.F2 PM-V2L2-1:U1.F3 PM-V2L2-1:U1.F4 PM-V2L2-1:U1.G1 PM-V2L2-1:U1.G2 PM-V2L2-1:U1.G3 PM-V2L2-1:U1.G4 PM-V2L2-1:U1.H2 PM-V2L2-1:U1.H3 PM-V2L2-1:U1.H4 PM-V2L2-1:U1.VOUT
SCLIN: CT-V2L1-1:U1.3 GBUS-TOP1:G2.13 GBUS-TOP1:H1.43
SDAIN: CT-V2L1-1:U1.6 GBUS-TOP1:G2.12 GBUS-TOP1:H1.41
SW_RUNPMA: J2.25 PM-V2L2-1:U1.A8
UART0_RX: CT-V2L1-1:J7.6 J2.48
UART0_TX: CT-V2L1-1:J7.7 J2.47
VBATT_IN: CT-V2L1-1:J7.1 GBUS-TOP1:G1.49 GBUS-TOP1:G1.50 GBUS-TOP1:G1.51 GBUS-TOP1:G1.52 GBUS-TOP1:G1.53 GBUS-TOP1:G1.54 GBUS-TOP1:G1.55 GBUS-TOP1:G1.56 GBUS-TOP1:G1.57 GBUS-TOP1:H2.45 GBUS-TOP1:H2.46 PM-V2L2-1:BC3.1 PM-V2L2-1:BC4.1 PM-V2L2-1:C1.A1 PM-V2L2-1:L1.1
VOUTA [2A-2OZ]: J2.1 J2.3 J2.5 J2.7 J2.9 J2.11 J2.13 J2.15 J2.17 J2.19 PM-V2L2-1:SJ6.2 PM-V2L2-1:TP4.1